# EAGLE board uno (EAGLE 6.1)
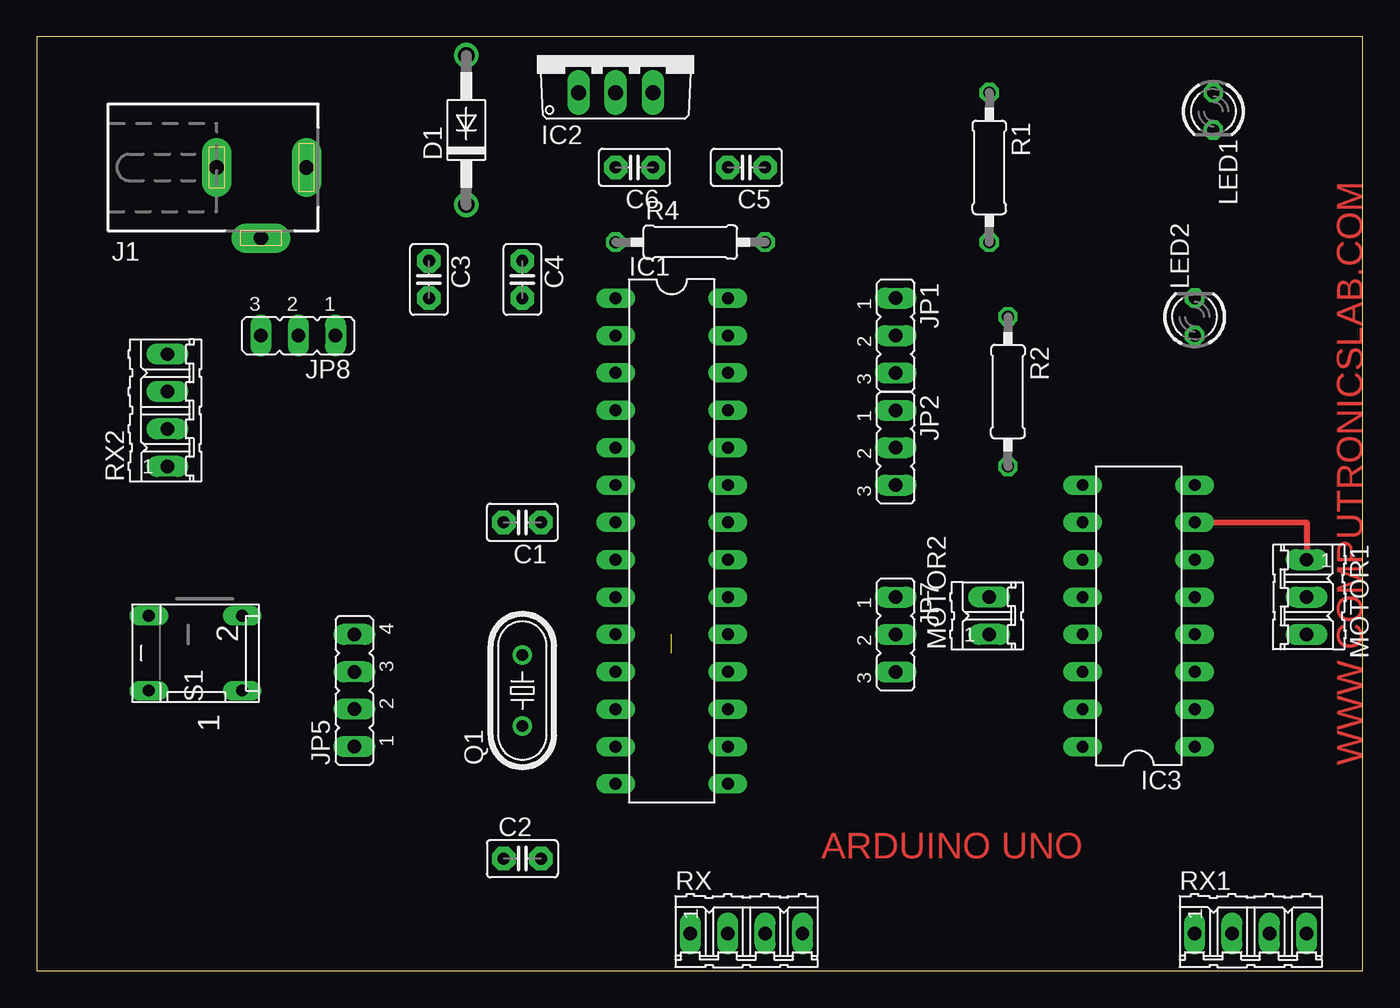
[diagram p0: board, top side]
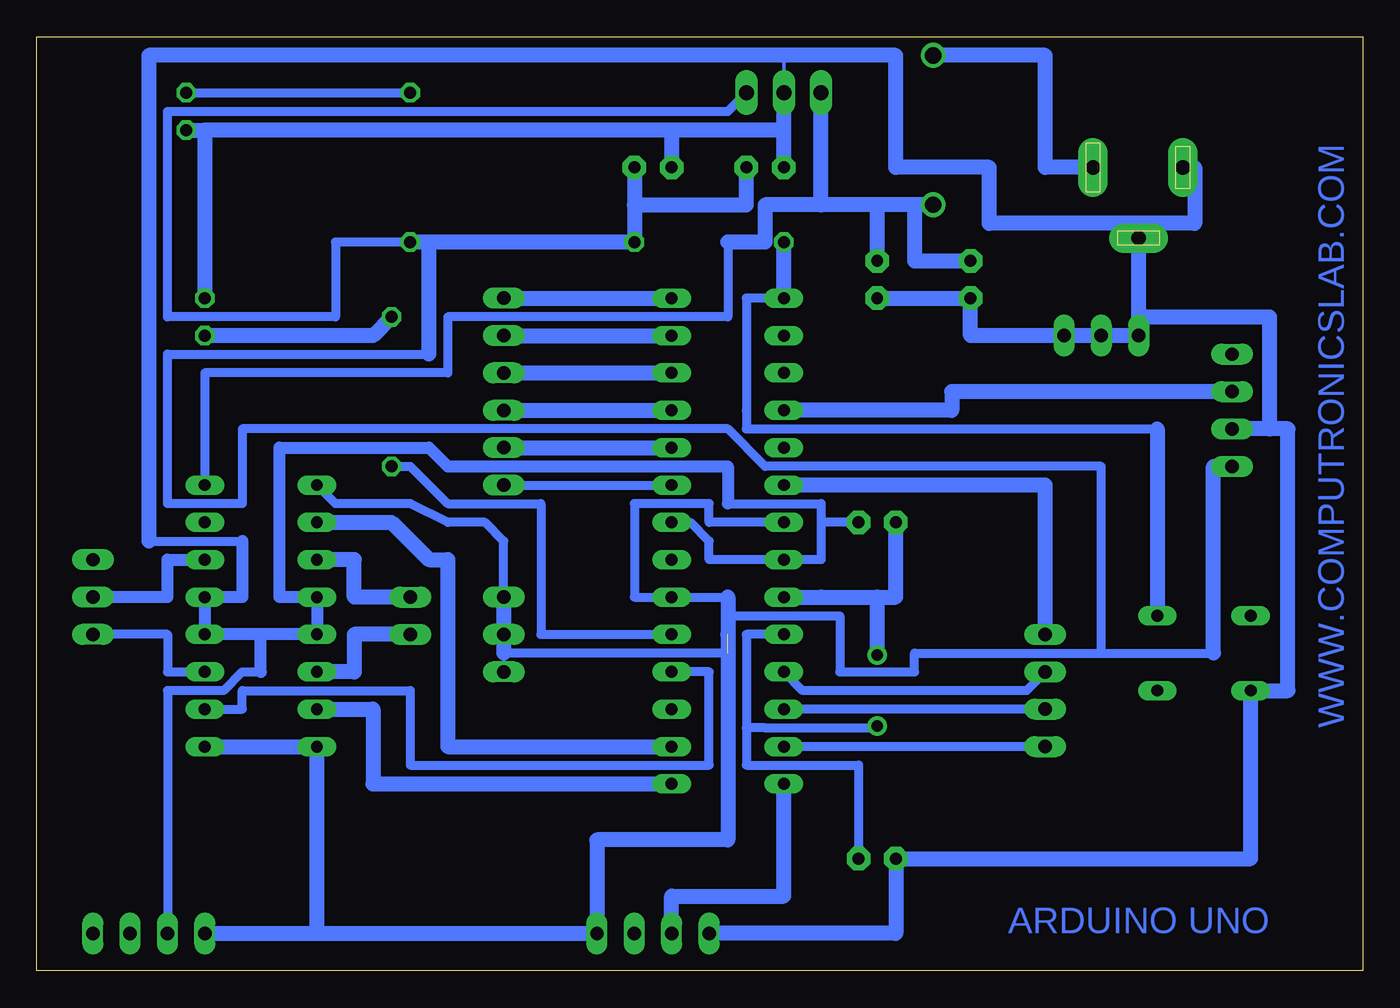
[diagram p1: board, bottom side, seen from below]

Size 90.17 x 63.49 mm. Coordinates in mm from the lower left corner, seen from the top.
Outline: 0,0 90.17,0 90.17,63.49 0,63.49 0,0
Copper layers (1*16): Top 0.035mm / dielectric 1.5mm / Bottom 0.035mm
Design rules: minimum track width 10mil, minimum drill 24mil, track to track 8mil, track to pad 8mil, pad to pad 8mil, via to via 8mil, smd to smd 8mil, copper to edge 40mil, drill to drill 8mil, minimum pad ring 10mil, minimum via ring 8mil, stop-mask expansion 4mil, vias tented up to drill 0mil, thermal gap 10mil

## Footprints (pad centres in the part's own frame; a part is rotated, then mirrored left to right if it is on the bottom)
C2.5-2 = drill 0.813 pad 1.6 octagon: 1 -1.27,0; 2 1.27,0
DO41-10 = drill 1.118: A 5.08,0; C -5.08,0
DIL28-3 = drill 0.813 long: 1 -16.51,-3.81; 2 -13.97,-3.81; 3 -11.43,-3.81; 4 -8.89,-3.81; 5 -6.35,-3.81; 6 -3.81,-3.81; 7 -1.27,-3.81; 8 1.27,-3.81; 9 3.81,-3.81; 10 6.35,-3.81; 11 8.89,-3.81; 12 11.43,-3.81; 13 13.97,-3.81; 14 16.51,-3.81; 15 16.51,3.81; 16 13.97,3.81; 17 11.43,3.81; 18 8.89,3.81; 19 6.35,3.81; 20 3.81,3.81; 21 1.27,3.81; 22 -1.27,3.81; 23 -3.81,3.81; 24 -6.35,3.81; 25 -8.89,3.81; 26 -11.43,3.81; 27 -13.97,3.81; 28 -16.51,3.81
TO220V = drill 1.016 long: 1 -2.54,-2.54; 2 0,-2.54; 3 2.54,-2.54
DIL16 = drill 0.813 long: 1 -8.89,-3.81; 2 -6.35,-3.81; 3 -3.81,-3.81; 4 -1.27,-3.81; 5 1.27,-3.81; 6 3.81,-3.81; 7 6.35,-3.81; 8 8.89,-3.81; 9 8.89,3.81; 10 6.35,3.81; 11 3.81,3.81; 12 1.27,3.81; 13 -1.27,3.81; 14 -3.81,3.81; 15 -6.35,3.81; 16 -8.89,3.81
DCJ0303 = drill 1 pad 2 long: 1 0,3.1; 2 4.8,0; 3 0,-3
JP2 = drill 0.914 long: 1 -2.54,0; 2 0,0; 3 2.54,0
JP4 = drill 0.914 long: 1 -3.81,0; 2 -1.27,0; 3 1.27,0; 4 3.81,0
LED3MM = drill 0.813 octagon: A -1.27,0; K 1.27,0
03P = drill 0.914 long: 1 -2.54,0; 2 0,0; 3 2.54,0
02P = drill 0.914 long: 1 -1.27,0; 2 1.27,0
HC49/S = drill 0.813: 1 -2.413,0; 2 2.413,0
0207/10 = drill 0.813 octagon: 1 -5.08,0; 2 5.08,0
04P = drill 0.914 long: 1 -3.81,0; 2 -1.27,0; 3 1.27,0; 4 3.81,0
DP-02 = drill 0.813 long: 1 -2.54,-2.54; 2 2.54,-2.54; 3 2.54,3.81; 4 -2.54,3.81

## Placement (x,y rotation side)
C1  22pf  [C2.5-2]  33.02,30.48 180 top
C2  22pf  [C2.5-2]  33.02,7.62 0 top
C3  470uF  [C2.5-2]  26.67,46.99 270 top
C4  0.1uf  [C2.5-2]  33.02,46.99 270 top
C5  0.1uf  [C2.5-2]  48.26,54.61 180 top
C6  4.7uf  [C2.5-2]  40.64,54.61 180 top
D1  1N4007  [DO41-10]  29.21,57.15 90 top
IC1  ATMEGA328  [DIL28-3]  43.18,29.21 270 top
IC2  7805  [TO220V]  39.37,62.23 0 top
IC3  L293D  [DIL16]  74.93,24.13 90 top
J1  [DCJ0303]  15.24,54.61 270 top
JP1  3 pin  [JP2]  58.42,43.18 270 top
JP2  3 pin  [JP2]  58.42,35.56 270 top
JP5  4 pin  [JP4]  21.59,19.05 90 top
JP7  [JP2]  58.42,22.86 270 top
JP8  [JP2]  17.78,43.18 180 top
LED1  3mm  [LED3MM]  80.01,58.42 270 top
LED2  3mm  [LED3MM]  78.74,44.45 90 top
MOTOR1  [03P]  86.36,25.4 270 top
MOTOR2  [02P]  64.77,24.13 90 top
Q1  16MHZ  [HC49/S]  33.02,19.05 90 top
R1  220R  [0207/10]  64.77,54.61 270 top
R2  330R  [0207/10]  66.04,39.37 270 top
R4  10K  [0207/10]  44.45,49.53 0 top
RX  [04P]  48.26,2.54 0 top
RX1  [04P]  82.55,2.54 0 top
RX2  [04P]  8.89,38.1 90 top
S1  push switch  [DP-02]  11.43,21.59 90 top

## Library data of the parts
C1-C6 = capacitor-wima
D1 = diode
IC1 = quantum-research-group; OC_FARNELL: unknown; OC_NEWARK: unknown
IC2 = linear
IC3 = st-microelectronics; MPN: L293D; OC_FARNELL: 9589619; OC_NEWARK: 56P8249
J1 = con-jack; OC_FARNELL: unknown; OC_NEWARK: unknown
JP1 JP2 JP5 JP7 JP8 = jumper
LED1 LED2 = led
MOTOR1 MOTOR2 RX RX1 RX2 = con-amp-quick; OC_FARNELL: unknown; OC_NEWARK: unknown
Q1 = crystal; OC_FARNELL: 1667008; OC_NEWARK: unknown
R1 R2 R4 = rcl
S1 = switch-dil; MPN: MCDP02; OC_FARNELL: 1255233; OC_NEWARK: 26M1095

## Nets
N$1: C1.2 IC1.9 Q1.2
N$2: C2.2 IC1.10 Q1.1
N$3: D1.A J1.1
N$4: C3.1 C4.1 D1.C IC2.1 IC3.8
N$5: C1.1 C2.1 C3.2 C4.2 C5.2 C6.2 IC1.8 IC1.22 IC2.2 IC3.4 IC3.5 IC3.12 IC3.13 J1.2 J1.3 JP8.1 JP8.2 JP8.3 LED1.K LED2.K RX1.2 RX2.2 RX.1 S1.4
N$6: LED1.A R1.1
N$7: IC3.7 MOTOR1.1
N$8: IC1.28 JP1.1
N$9: IC1.27 JP1.2
N$10: IC1.26 JP1.3
N$11: IC1.25 JP2.1
N$12: IC1.24 JP2.2
N$13: IC1.23 JP2.3
N$14: IC1.14 RX.2
N$15: IC1.18 IC3.2
N$16: IC1.15 IC3.15
N$17: IC1.4 RX2.3
N$18: IC1.6 JP5.4
N$19: IC1.12 JP5.2
N$20: IC1.11 JP5.3
N$21: IC1.16 IC3.10
N$25: IC3.14 MOTOR2.1
N$27: IC1.19 R2.2
N$28: IC3.11 MOTOR2.2
N$29: IC1.13 JP5.1
N$31: IC1.1 R4.1 S1.2
N$32: LED2.A R2.1
N$33: C5.1 C6.1 IC1.7 IC1.20 IC2.3 IC3.1 IC3.9 IC3.16 JP7.1 JP7.2 JP7.3 R1.2 R4.2 RX1.1 RX2.1 RX.4
N$34: IC3.6 MOTOR1.2
N$35: IC3.3 MOTOR1.3

## Tracks (layer width: path | path; a pad name or v marks a point on that pad's centre or on a via)
N$1
  Bottom 1.016: 33.02,25.4 36.83,25.4 IC1.9 | 33.02,25.4 Q1.2 | 33.02,25.4 31.75,25.4 C1.2
N$2
  Bottom 0.254: 33.02,16.51 Q1.1
  Bottom 0.61: 33.02,16.51 40.64,16.51 41.91,16.51 | 41.91,16.51 41.91,22.86 IC1.10 | C2.2 34.29,13.97 41.91,13.97 41.91,16.51
N$3
  Bottom 1.016: D1.A 21.59,62.23 21.59,54.61 J1.1
N$4
  Bottom 0.61: IC3.8 78.74,40.64 62.23,40.64 62.23,44.45 43.18,44.45 43.18,49.53
  Bottom 1.016: 43.18,49.53 40.64,49.53 40.64,52.07 36.83,52.07 | D1.C 30.48,52.07 | 30.48,52.07 33.02,52.07 | 33.02,52.07 36.83,52.07 | 36.83,52.07 IC2.1 | 30.48,52.07 30.48,48.26 C3.1 | 33.02,52.07 C4.1
N$5
  Bottom 0.254: 6.35,36.83 RX2.2 | 39.37,62.23 IC2.2 | 15.24,50.8 J1.2
  Bottom 0.61: 36.83,30.48 36.83,27.94 IC1.8 44.45,27.94 44.45,29.21 45.72,30.48 IC1.22 | C1.1 36.83,30.48 | RX1.2 81.28,19.05 77.47,19.05 76.2,20.32 74.93,20.32 | 36.83,30.48 36.83,31.75 43.18,31.75 | 82.55,29.21 76.2,29.21
  Bottom 0.813: 74.93,22.86 IC3.13 IC3.12 73.66,25.4 73.66,35.56 63.5,35.56 62.23,34.29 43.18,34.29 43.18,31.75 | 74.93,20.32 74.93,22.86 | 74.93,22.86 IC3.4 IC3.5 76.2,25.4 76.2,29.21
  Bottom 1.016: 78.74,57.15 LED2.K | LED1.K 78.74,57.15 | C6.2 39.37,57.15 | 39.37,57.15 IC2.2 | 46.99,57.15 C5.2 | 39.37,57.15 46.99,57.15 | 46.99,57.15 78.74,57.15 | J1.3 11.43,54.61 11.43,50.8 15.24,50.8 25.4,50.8 25.4,54.61 31.75,54.61 31.75,62.23 39.37,62.23 82.55,62.23 82.55,29.21 | C4.2 C3.2 26.67,43.18 JP8.1 JP8.2 JP8.3 | 6.35,36.83 6.35,44.45 15.24,44.45 JP8.3 | JP8.3 J1.2 | RX.1 31.75,2.54 C2.1 7.62,7.62 S1.4 5.08,19.05 5.08,36.83 RX2.2
N$6
  Bottom 0.61: LED1.A R1.1
N$7
  Top 0.406: IC3.7 86.36,30.48 MOTOR1.1
N$8
  Bottom 1.016: JP1.1 IC1.28
N$9
  Bottom 1.016: JP1.2 IC1.27
N$10
  Bottom 1.016: JP1.3 IC1.26
N$11
  Bottom 1.016: JP2.1 IC1.25
N$12
  Bottom 1.016: JP2.2 IC1.24
N$13
  Bottom 0.61: JP2.3 IC1.23
N$14
  Bottom 1.016: IC1.14 39.37,5.08 46.99,5.08 RX.2
N$15
  Bottom 0.61: IC1.18 44.45,20.32 44.45,13.97 64.77,13.97 64.77,19.05 76.2,19.05 76.2,17.78 IC3.2
N$16
  Bottom 1.016: IC1.15 67.31,12.7 67.31,17.78 IC3.15
N$17
  Bottom 1.016: IC1.4 27.94,38.1 27.94,39.37 17.78,39.37 RX2.3
N$18
  Bottom 1.016: JP5.4 21.59,33.02 IC1.6
N$19
  Bottom 0.61: JP5.2 IC1.12
N$20
  Bottom 0.61: IC1.11 38.1,19.05 22.86,19.05 JP5.3
N$21
  Bottom 1.016: IC1.16 62.23,15.24 62.23,27.94 63.5,27.94 66.04,30.48 IC3.10
N$25
  Bottom 1.016: IC3.14 68.58,20.32 68.58,22.86 MOTOR2.1
N$27
  Bottom 0.61: IC1.19 55.88,22.86 55.88,31.75 62.23,31.75 64.77,34.29 R2.2
N$28
  Bottom 1.016: IC3.11 68.58,27.94 68.58,25.4 MOTOR2.2
N$29
  Bottom 0.61: JP5.1 IC1.13
N$31
  Bottom 0.61: 13.97,36.83 40.64,36.83 41.91,36.83 41.91,38.1 41.91,45.72 IC1.1
  Bottom 1.016: 13.97,36.83 S1.2 | IC1.1 R4.1
N$32
  Bottom 1.016: LED2.A 67.31,43.18 R2.1
N$33  (1 unrouted)
  Bottom 0.254: 58.42,21.59 JP7.3 | 43.18,25.4 43.18,24.13
  Bottom 0.61: IC2.3 43.18,58.42 81.28,58.42 81.28,44.45 69.85,44.45 69.85,49.53 R1.2 | IC3.9 69.85,31.75 64.77,31.75 62.23,30.48 59.69,30.48 58.42,29.21 JP7.1 | IC1.7 44.45,30.48 44.45,31.75 49.53,31.75 49.53,25.4 IC1.20 43.18,25.4 | 17.78,21.59 30.48,21.59 30.48,20.32 35.56,20.32 35.56,24.13 43.18,24.13 | 17.78,21.59 10.16,21.59 | 43.18,21.59 58.42,21.59 | 63.5,41.91 81.28,41.91 81.28,31.75 76.2,31.75 76.2,36.83 43.18,36.83 40.64,34.29 17.78,34.29 17.78,21.59
  Bottom 1.016: C5.1 49.53,52.07 | 49.53,52.07 R4.2 R1.2 63.5,49.53 63.5,41.91 | C6.1 41.91,52.07 49.53,52.07 | IC3.1 IC3.16 71.12,2.54 | RX1.1 71.12,2.54 | 71.12,2.54 RX.4 52.07,8.89 43.18,8.89 43.18,22.86 | 58.42,21.59 JP7.2 JP7.1 | RX2.1 10.16,34.29 10.16,21.59 | 43.18,25.4 43.18,21.59
N$34
  Bottom 0.813: IC3.6 81.28,27.94 81.28,25.4 MOTOR1.2
N$35
  Bottom 0.61: IC3.3 81.28,20.32 81.28,22.86 MOTOR1.3

## Text on the board
Top: WWW.COMPUTRONICSLAB.COM | ARDUINO UNO
Bottom: WWW.COMPUTRONICSLAB.COM | ARDUINO UNO